# EAGLE board Evaluation_Board (EAGLE 6.5.0)
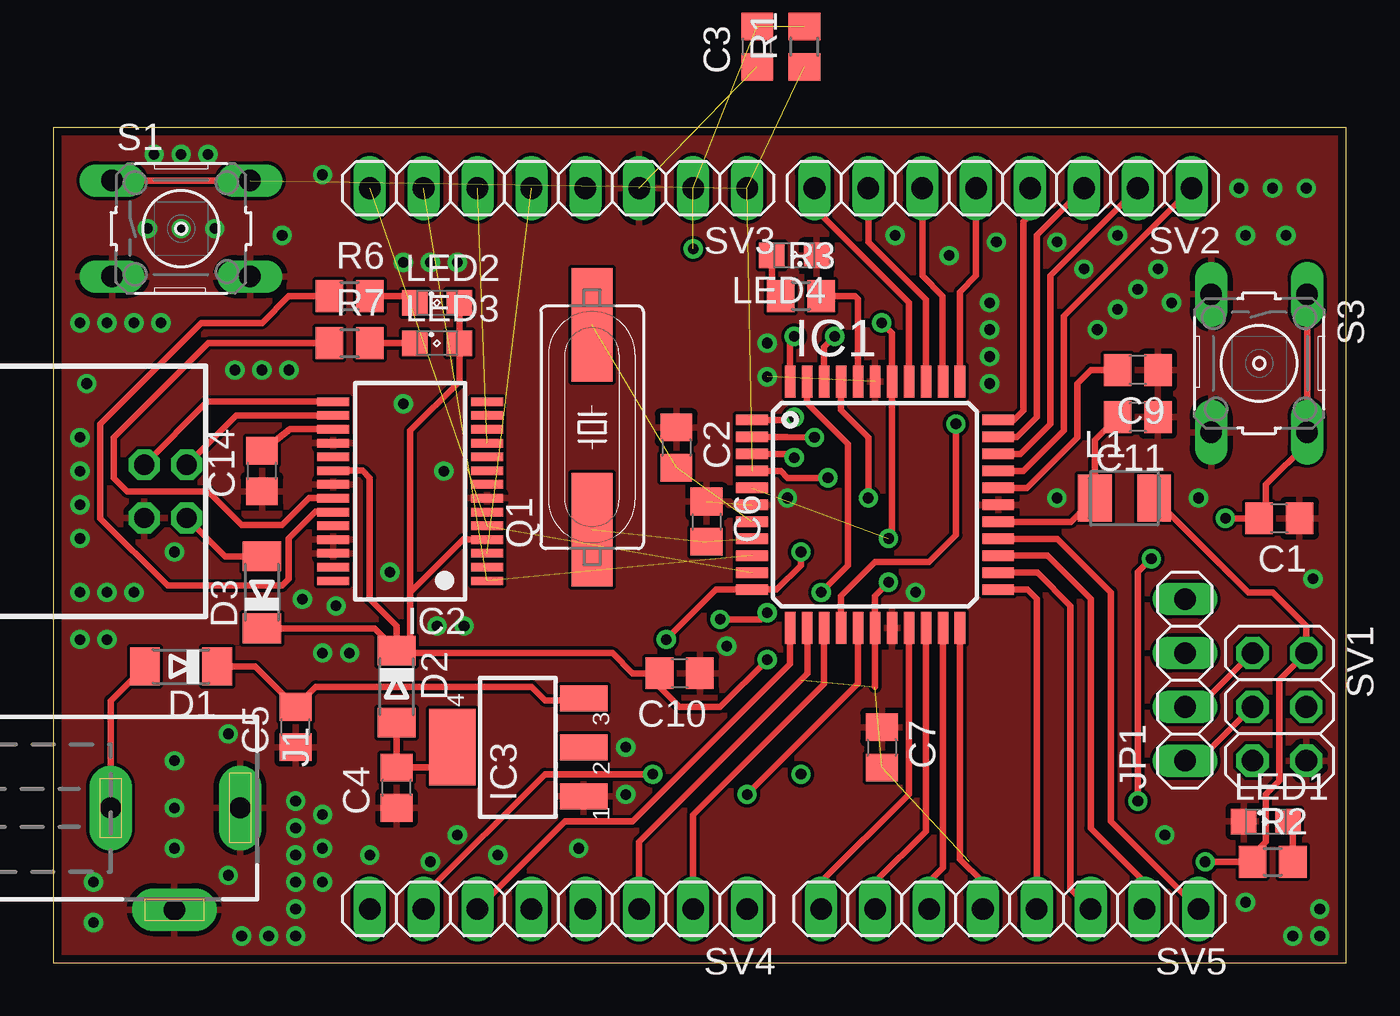
[diagram p0: board, top side]
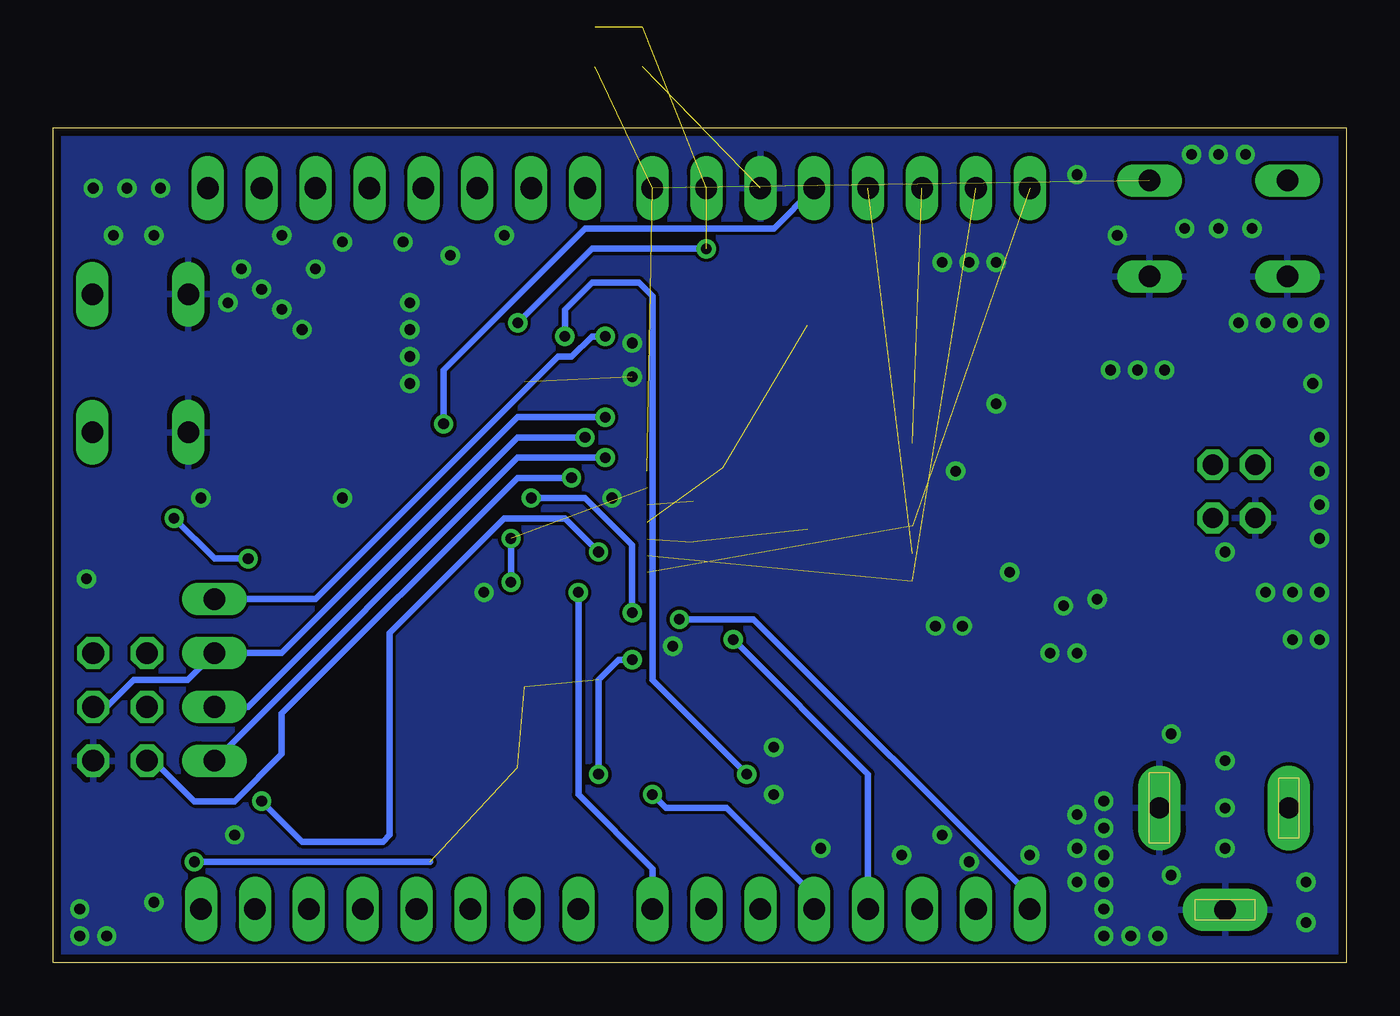
[diagram p1: board, bottom side, seen from below]

Size 60.95 x 39.36 mm. Coordinates in mm from the lower left corner, seen from the top.
Outline: 0,0 60.95,0 60.95,39.36 0,39.36 0,0
Copper layers (1*16): Top 0.035mm / dielectric 1.5mm / Bottom 0.035mm
Design rules "osh-park": minimum track width 6mil, minimum drill 13mil, track to track 6mil, track to pad 6mil, pad to pad 8mil, via to via 8mil, smd to smd 8mil, copper to edge 15mil, drill to drill 7mil, minimum pad ring 10mil, minimum via ring 8mil, stop-mask expansion 4mil, vias tented up to drill 0mil, thermal gap 10mil

## Footprints (pad centres in the part's own frame; a part is rotated, then mirrored left to right if it is on the bottom)
C0805 = smd 1.3 x 1.5: 1 -0.95,0; 2 0.95,0
MINIMELF = smd 1.4 x 1.8: A 1.7,0; C -1.7,0
TQFP44 = smd 1.5 x 0.5: 1 -5.8,4; 2 -5.8,3.2; 3 -5.8,2.4; 4 -5.8,1.6; 5 -5.8,0.8; 6 -5.8,0; 7 -5.8,-0.8; 8 -5.8,-1.6; 9 -5.8,-2.4; 10 -5.8,-3.2; 11 -5.8,-4; 23 5.8,-4; 24 5.8,-3.2; 25 5.8,-2.4; 26 5.8,-1.6; 27 5.8,-0.8; 28 5.8,0; 29 5.8,0.8; 30 5.8,1.6; 31 5.8,2.4; 32 5.8,3.2; 33 5.8,4 | smd 0.5 x 1.5: 12 -4,-5.8; 13 -3.2,-5.8; 14 -2.4,-5.8; 15 -1.6,-5.8; 16 -0.8,-5.8; 17 0,-5.8; 18 0.8,-5.8; 19 1.6,-5.8; 20 2.4,-5.8; 21 3.2,-5.8; 22 4,-5.8; 34 4,5.8; 35 3.2,5.8; 36 2.4,5.8; 37 1.6,5.8; 38 0.8,5.8; 39 0,5.8; 40 -0.8,5.8; 41 -1.6,5.8; 42 -2.4,5.8; 43 -3.2,5.8; 44 -4,5.8
SSOP28 = smd 0.4 x 1.5: 1 -4.225,-3.625; 2 -3.575,-3.625; 3 -2.925,-3.625; 4 -2.275,-3.625; 5 -1.625,-3.625; 6 -0.975,-3.625; 7 -0.325,-3.625; 8 0.325,-3.625; 9 0.975,-3.625; 10 1.625,-3.625; 11 2.275,-3.625; 12 2.925,-3.625; 13 3.575,-3.625; 14 4.225,-3.625; 15 4.225,3.625; 16 3.575,3.625; 17 2.925,3.625; 18 2.275,3.625; 19 1.625,3.625; 20 0.975,3.625; 21 0.325,3.625; 22 -0.325,3.625; 23 -0.975,3.625; 24 -1.625,3.625; 25 -2.275,3.625; 26 -2.925,3.625; 27 -3.575,3.625; 28 -4.225,3.625
SOT223 = smd 1.219 x 2.235: 1 -2.311,-3.099; 2 0,-3.099; 3 2.311,-3.099 | smd 3.6 x 2.2: 4 0,3.099
DCJ0202 = drill 1 pad 2 long: 1 0,3.1; 2 4.8,0; 3 0,-3
1X04 = drill 1.016 long: 1 -3.81,0; 2 -1.27,0; 3 1.27,0; 4 3.81,0
L3225M = smd 1.6 x 2.2: 1 -1.4,0; 2 1.4,0
SML0805 = smd 1.2 x 1.2: A 1.05,0; C -1.05,0
HC49UP = smd 5.334 x 1.93: 1 -4.826,0; 2 4.826,0
R0805 = smd 1.3 x 1.5: 1 -0.95,0; 2 0.95,0
B3F-10XX = drill 1.016 long: 1 -3.251,2.261; 2 3.251,2.261; 3 -3.251,-2.261; 4 3.251,-2.261
2X03 = drill 1.016 octagon: 1 -2.54,-1.27; 2 -2.54,1.27; 3 0,-1.27; 4 0,1.27; 5 2.54,-1.27; 6 2.54,1.27
1X08 = drill 1.016 long: 1 -8.89,0; 2 -6.35,0; 3 -3.81,0; 4 -1.27,0; 5 1.27,0; 6 3.81,0; 7 6.35,0; 8 8.89,0
USB-B-BUCHSE-HORIZONTAL = drill 0.95 octagon: 1 1.25,9.79; 2 -1.25,9.79; 3 -1.25,7.79; 4 1.25,7.79

## Placement (x,y rotation side)
C1  100n  [C0805]  57.78,20.95 180 top
C2  12p  [C0805]  29.37,24.29 270 top
C3  100n  [C0805]  33.18,43.18 90 top
C4  47u  [C0805]  16.19,8.26 90 top
C5  47u  [C0805]  11.43,11.11 90 top
C6  12p  [C0805]  30.8,20.8 270 top
C7  100n  [C0805]  39.05,10.16 270 top
C9  100n  [C0805]  51.12,27.94 180 top
C10  100n  [C0805]  29.53,13.65 180 top
C11  100n  [C0805]  51.12,25.72 180 top
C14  100n  [C0805]  9.84,23.18 90 top
D1  [MINIMELF]  6.03,13.97 180 top
D2  [MINIMELF]  16.19,13.02 270 top
D3  [MINIMELF]  9.84,17.46 90 top
IC1  MEGA32-A  [TQFP44]  38.73,21.59 0 top
IC2  FT232RL  [SSOP28]  16.83,22.23 90 top
IC3  317EMP  [SOT223]  21.91,10.16 90 top
J1  DCJ0202  [DCJ0202]  5.71,7.3 270 top
JP1  [1X04]  53.34,13.34 90 top
L1  10u  [L3225M]  50.48,21.91 0 top
LED1  green on  [SML0805]  57.15,6.67 0 top
LED2  Rx  [SML0805]  18.1,31.11 0 top
LED3  Tx  [SML0805]  18.1,29.21 0 top
LED4  yellow  [SML0805]  34.92,33.34 180 top
Q1  16 MHz  [HC49UP]  25.4,25.24 90 top
R1  10k  [R0805]  35.4,43.18 90 top
R2  1k  [R0805]  57.47,4.76 0 top
R3  500  [R0805]  35.24,31.43 0 top
R6  1k  [R0805]  13.97,31.43 0 top
R7  1k  [R0805]  13.97,29.21 0 top
S1  [B3F-10XX]  6.03,34.61 0 top
S3  [B3F-10XX]  56.83,28.26 270 top
SV1  ISP  [2X03]  57.78,12.06 270 top
SV2  ADC  [1X08]  44.77,36.51 180 top
SV3  [1X08]  23.81,36.51 180 top
SV4  [1X08]  23.81,2.54 180 top
SV5  [1X08]  45.09,2.54 180 top
X1  [USB-B-BUCHSE-HORIZONTAL]  -3.49,22.23 270 top

## Library data of the parts
C1-C7 C9-C11 C14 L1 R1-R3 R6 R7 = rcl
D1-D3 = diode
IC1 = atmel; MPN: ATMEGA32-16AU; OC_FARNELL: 9171274; OC_NEWARK: 69K6677
IC2 = ftdichip; MPN: FT232RL; OC_FARNELL: 1146032; OC_NEWARK: 91K9918
IC3 = linear
J1 = con-jack; OC_FARNELL: unknown; OC_NEWARK: unknown
JP1 SV1-SV5 = pinhead
LED1-LED4 = led
Q1 = crystal; OC_FARNELL: unknown; OC_NEWARK: unknown
S1 S3 = switch-omron; MPN: B3F-1000; OC_FARNELL: 176432; OC_NEWARK: 36M3542
X1 = EmbeddedProjectsBauteile

## Nets
+5V: C3.2 C7.2 C10.2 D2.C D3.C IC1.5 IC1.17 IC1.38 IC2.4 IC2.20 L1.2 LED2.A LED3.A R1.2 R2.1 SV1.2 SV3.2
CTS: IC2.11 SV3.6
GND: C1.1 C2.1 C3.1 C4.1 C5.1 C6.1 C7.1 C9.1 C10.1 C11.1 C14.1 IC1.6 IC1.18 IC1.28 IC1.39 IC2.7 IC2.18 IC2.21 IC2.25 IC2.26 IC3.1 J1.1 J1.2 LED1.C LED4.C S1.3 S1.4 S3.3 S3.4 SV1.6 SV3.3 X1.4
MISO: IC1.2 JP1.2 SV1.1
MOSI: IC1.1 JP1.3 SV1.4
N$1: D3.A X1.1
N$2: C4.2 D2.A IC3.4
N$3: D1.A J1.3
N$4: IC2.23 R6.1
N$5: LED1.A R2.2
N$6: IC1.30 SV2.1
N$7: IC1.31 SV2.2
N$8: IC1.32 SV2.3
N$9: IC1.33 SV2.4
N$10: IC1.34 SV2.5
N$11: IC1.35 SV2.6
N$12: IC1.36 SV2.7
N$13: IC1.37 SV2.8
N$14: LED2.C R6.2
N$15: IC2.22 R7.1
N$16: LED3.C R7.2
N$17: C2.2 IC1.7 Q1.2
N$18: IC2.15 X1.3
N$19: IC2.16 X1.2
N$20: C14.2 IC2.17
N$25: C6.2 IC1.8 Q1.1
N$26: LED4.A R3.1
N$28: C9.2 IC1.29
N$30: C11.2 IC1.27 L1.1
N$31: IC1.21 SV5.6
N$32: IC1.22 SV5.5
N$33: IC1.23 SV5.4
N$34: IC1.24 SV5.3
N$35: IC1.25 SV5.2
N$36: IC1.26 SV5.1
NETZ: C5.2 D1.C IC3.3
OC0: IC1.43 SV4.1
OC1A: IC1.14 SV4.2
OC1B: IC1.13 SV4.3
OC2: IC1.16 SV4.4
PB0: IC1.40 R3.2
PB1: IC1.41 SV4.8
PB2_INT2: IC1.42 SV4.7
PD2_INT0: C1.2 IC1.11 S3.1 S3.2 SV4.5
PD3_INT1: IC1.12 SV4.6
PD6: IC1.15 SV3.4
RESET: IC1.4 R1.1 S1.1 S1.2 SV1.5 SV3.1
RTS: IC2.3 SV3.5
RX_USB: IC1.9 IC2.1 SV3.7
SCK: IC1.3 JP1.1 SV1.3
SCL: IC1.19 SV5.8
SDA: IC1.20 SV5.7
SS: IC1.44 JP1.4
TX_USB: IC1.10 IC2.5 SV3.8

## Tracks (layer width: path | path; a pad name or v marks a point on that pad's centre or on a via)
+5V  (via drill 0.5)  (7 unrouted)
  Top 0.305: D2.C 16.19,15.88 14.92,17.14 14.92,22.86 14.58,23.2 IC2.20 | D3.C 15.15,15.76 D2.C | IC2.4 19.32,19.95 16.83,17.46 | 16.83,17.46 16.83,15.35 D2.C | LED2.A LED3.A 19.15,27.4 16.83,25.08 16.83,17.46 | D2.C 16.51,14.4 16.51,14.29 16.83,14.61 26.35,14.61 27.3,13.65 C10.2 28.58,13.02 29.53,12.06 31.43,12.06 v33.66,14.29 | L1.2 56.33,17.46 57.47,17.46 59.05,15.88 SV1.2 57.78,13.34 57.78,8.57 57.15,7.94 57.15,5.71 56.52,5.08 R2.1 v54.29,4.76 | v39.37,17.94 38.73,17.3 IC1.17 38.73,13.02 | v39.37,20 39.53,20.17 IC1.38 39.53,29.68 v39.05,30.16
  Bottom 0.305: 43.18,4.76 v54.29,4.76 | v30.16,33.66 35.56,33.66 v39.05,30.16 | v39.37,17.94 v39.37,20 | v33.66,14.29 34.29,14.29 35.24,13.34 v35.24,8.89
CTS  (1 unrouted)
GND  (via drill 0.5)  (3 unrouted)
  other vias: 11.43,7.62 11.43,6.35 11.43,5.08 11.43,3.81 11.43,2.54 12.7,6.99 12.7,5.4 11.75,17.14 8.57,27.94 9.84,27.94 11.11,27.94 44.13,27.3 44.13,28.57 44.13,29.84 44.13,31.11 42.23,33.34 39.69,34.29 48.58,32.7 47.31,33.97 47.31,21.91 52.39,6.03 24.77,5.4 20.95,5.08 18.1,15.88 19.37,15.88 53.98,21.91 49.21,29.84 50.16,30.8 51.12,31.75 52.07,32.7 52.7,31.11 55.88,36.51 56.2,34.29 58.1,34.29 59.05,36.51 57.47,36.51 56.2,2.86 1.91,1.91 5.71,9.53 5.71,5.4 5.71,7.3 5.71,19.37 4.45,34.61 6.03,34.61 7.62,34.61 10.79,34.29 12.7,37.15 16.51,26.35 18.41,23.18 15.88,18.41 16.51,33.02 17.78,33.02 19.05,33.02 2.54,30.16 3.81,30.16 5.08,30.16 1.59,27.3 1.27,24.77 1.27,23.18 1.27,21.59 1.27,17.46 3.81,17.46 1.27,20 2.54,17.46 8.26,10.79 8.26,4.13 1.91,3.81 11.43,1.27 12.7,3.81 17.78,4.76 19.05,6.03 26.99,7.94 26.99,10.16 33.66,29.21 44.45,33.97 50.16,34.29 59.37,18.1 59.69,2.54 59.69,1.27 58.42,1.27 10.16,1.27 8.89,1.27 14.92,5.08 13.97,14.61 12.7,14.61 1.27,15.24 2.54,15.24 13.34,16.83 1.27,30.16 4.76,38.1 6.03,38.1 7.3,38.1 33.66,27.62 31.75,14.92 34.61,21.91 40.64,17.46
  pour Bottom: 0,39.37 60.96,39.37 60.96,0 0,0
  pour Top: 0,39.37 60.96,39.37 60.96,0 0,0
MISO  (via drill 0.5)
  Top 0.305: JP1.2 53.98,12.06 SV1.1 | IC1.2 34.58,24.79 v35.88,24.77
  Bottom 0.305: JP1.2 51.75,12.06 39.05,24.77 v35.88,24.77
MOSI  (via drill 0.5)
  Top 0.305: IC1.1 34.8,25.59 v34.92,25.72
  Bottom 0.305: SV1.4 58.42,12.06 57.15,13.34 54.61,13.34 JP1.3 50.16,14.61 39.05,25.72 v34.92,25.72
N$1
  Top 0.305: D3.A 8.11,19.16 X1.1
N$2
  Top 0.305: D2.A C4.2 17.85,9.21 IC3.4
N$3
  Top 0.305: J1.3 2.71,12.35 D1.A
N$4
  Top 0.305: R6.1 11.11,31.43 9.84,30.16 6.99,30.16 2.22,25.4 2.22,20.95 5.4,17.78 10.79,17.78 11.11,18.1 11.11,20 12.38,21.27 13.18,21.27 IC2.23
N$5
  Top 0.305: R2.2 58.42,6.45 LED1.A
N$6
  Top 0.305: IC1.30 45.73,23.19 47.62,25.08 47.62,30.48 SV2.1
N$7
  Top 0.305: IC1.31 45.58,23.99 46.99,25.4 46.99,32.38 SV2.2
N$8
  Top 0.305: IC1.32 45.43,24.79 46.35,25.72 46.35,34.29 SV2.3
N$9
  Top 0.305: SV2.4 46.04,35.24 45.72,34.92 45.72,26.04 45.27,25.59 IC1.33
N$10
  Top 0.305: SV2.5 43.5,32.38 42.73,31.62 IC1.34
N$11
  Top 0.305: SV2.6 40.96,32.38 41.91,31.43 41.91,27.41 IC1.35
N$12
  Top 0.305: SV2.7 38.42,33.97 41.13,31.25 IC1.36
N$13
  Top 0.305: SV2.8 35.88,35.56 40.32,31.11 40.32,27.4 IC1.37
N$14
  Top 0.305: R6.2 16.73,31.43 LED2.C
N$15
  Top 0.305: R7.1 7.3,29.21 2.86,24.77 2.86,22.86 3.49,22.23 7.3,22.23 8.89,20.64 10.79,20.64 12.06,21.91 IC2.22
N$16
  Top 0.305: R7.2 LED3.C
N$17  (2 unrouted)
N$18
  Top 0.305: X1.3 7.27,26.45 IC2.15
N$19
  Top 0.305: X1.2 8.62,25.8 IC2.16
N$20
  Top 0.305: IC2.17 11.18,25.15 C14.2
N$25  (2 unrouted)
N$26
  Top 0.305: R3.1 33.88,31.85 LED4.A
N$28
  Top 0.305: IC1.29 45.88,22.39 48.26,24.77 48.26,27.3 48.9,27.94 C9.2
N$30
  Top 0.305: IC1.27 47.97,20.79 L1.1 49.08,24.63 C11.2
N$31
  Top 0.305: SV5.6 41.27,3.81 41.94,4.47 IC1.21
N$32
  Top 0.305: IC1.22 42.73,4.89 43.81,3.81 SV5.5
N$33
  Top 0.305: IC1.23 45.91,17.59 46.35,17.14 SV5.4
N$34
  Top 0.305: IC1.24 46.38,18.39 47.94,16.83 47.94,3.49 SV5.3
N$35
  Top 0.305: IC1.25 46.85,19.19 48.9,17.14 48.9,6.35 51.44,3.81 SV5.2
N$36
  Top 0.305: IC1.26 47.32,19.99 49.85,17.46 49.85,6.67 SV5.1
NETZ
  Top 0.305: D1.C 9.52,13.97 C5.2 12.38,13.02 22.54,13.02 23.18,12.38 25.72,12.38 25.63,12.47 IC3.3
OC0  (via drill 0.5)
  Top 0.305: IC1.43 35.53,26.38 37.47,24.45 37.47,18.73 v36.2,17.46
  Bottom 0.305: SV4.1 32.7,4.45 36.2,7.94 v36.2,17.46
OC1A
  Top 0.305: IC1.14 36.34,13.16 30.16,6.99 SV4.2
OC1B
  Top 0.305: SV4.3 27.62,5.71 35.56,13.65 35.56,15.77 IC1.13
OC2  (via drill 0.5)
  Top 0.305: IC1.16 37.94,13.17 v32.7,7.94
  Bottom 0.305: SV4.4 25.08,3.17 29.21,7.3 32.07,7.3 v32.7,7.94
PB0
  Top 0.305: IC1.40 37.94,31.28 37.78,31.43 R3.2
PB1  (via drill 0.5)
  Top 0.305: IC1.41 37.13,26.05 38.42,24.77 v38.42,21.91 | v31.43,16.19 33.34,16.19 v33.66,16.51
  Bottom 0.305: SV4.8 14.92,3.17 27.94,16.19 v31.43,16.19 | v33.66,16.51 33.66,19.68 35.88,21.91 v38.42,21.91
PB2_INT2  (via drill 0.5)
  Top 0.305: SV4.7 17.46,3.17 23.18,8.89 v28.26,8.89 | IC1.42 36.34,29.03 v36.83,29.53
  Bottom 0.305: v36.83,29.53 36.83,30.8 35.56,32.07 33.34,32.07 32.7,31.43 32.7,13.34 v28.26,8.89
PD2_INT0  (via drill 0.5)
  Top 0.305: S3.1 S3.2 59.09,24.49 57.15,22.54 57.15,21.27 C1.2 v55.24,20.95 | v51.75,19.05 51.12,18.41 v51.12,7.62 | v28.89,15.24 31.24,17.59 IC1.11 34.1,17.59 35.24,18.73 v35.24,19.37
  Bottom 0.305: SV4.5 22.54,8.89 v28.89,15.24 | v55.24,20.95 53.34,19.05 v51.75,19.05 | v51.12,7.62 49.21,5.71 45.4,5.71 45.09,6.03 45.09,15.56 39.69,20.95 36.83,20.95 v35.24,19.37
PD3_INT1
  Top 0.305: SV4.6 24.13,6.67 27.3,6.67 34.73,14.1 IC1.12
PD6  (via drill 0.5)
  Top 0.305: 37.15,15.8 IC1.15 37.13,17.29 38.73,18.89 41.27,18.89 42.55,20.16 v42.55,25.4
  Bottom 0.305: SV3.4 26.99,34.61 35.88,34.61 42.55,27.94 v42.55,25.4
RESET  (via drill 0.5)  (3 unrouted)
  Top 0.305: S1.2 S1.1 | v36.51,22.86 34.61,22.86 34.29,23.18 32.95,23.18 IC1.4
  Bottom 0.305: SV1.5 56.2,9.53 54.29,7.62 52.39,7.62 50.16,9.84 50.16,11.75 39.05,22.86 v36.51,22.86
RTS  (1 unrouted)
RX_USB  (2 unrouted)
SCK  (via drill 0.5)
  Top 0.305: JP1.1 53.98,9.53 SV1.3 | IC1.3 34.75,23.99 v34.92,23.81
  Bottom 0.305: JP1.1 39.05,23.81 v34.92,23.81
SCL
  Top 0.305: IC1.19 40.34,7.95 36.2,3.81 SV5.8
SDA
  Top 0.305: SV5.7 38.73,3.81 41.13,6.21 IC1.20
SS  (via drill 0.5)
  Top 0.305: IC1.44 34.73,29.34 v34.92,29.53
  Bottom 0.305: JP1.4 48.58,17.14 37.15,28.57 36.51,28.57 35.56,29.53 v34.92,29.53
TX_USB  (2 unrouted)

## Text on the board
tNames: Tobias Nuß / AVR-Evaluationsboard / März 2015